# Altium PCB CPU.PcbDoc
Units mm, origin at the board's own origin, x right, y up, seen from the top; angles counter-clockwise.
Board outline 312 x 320 mm, 2 copper layers (Top Layer, Bottom Layer); 71 components, 61 nets, 327 pads, 8 vias.
Unrouted connection lines stored in the file: 131.
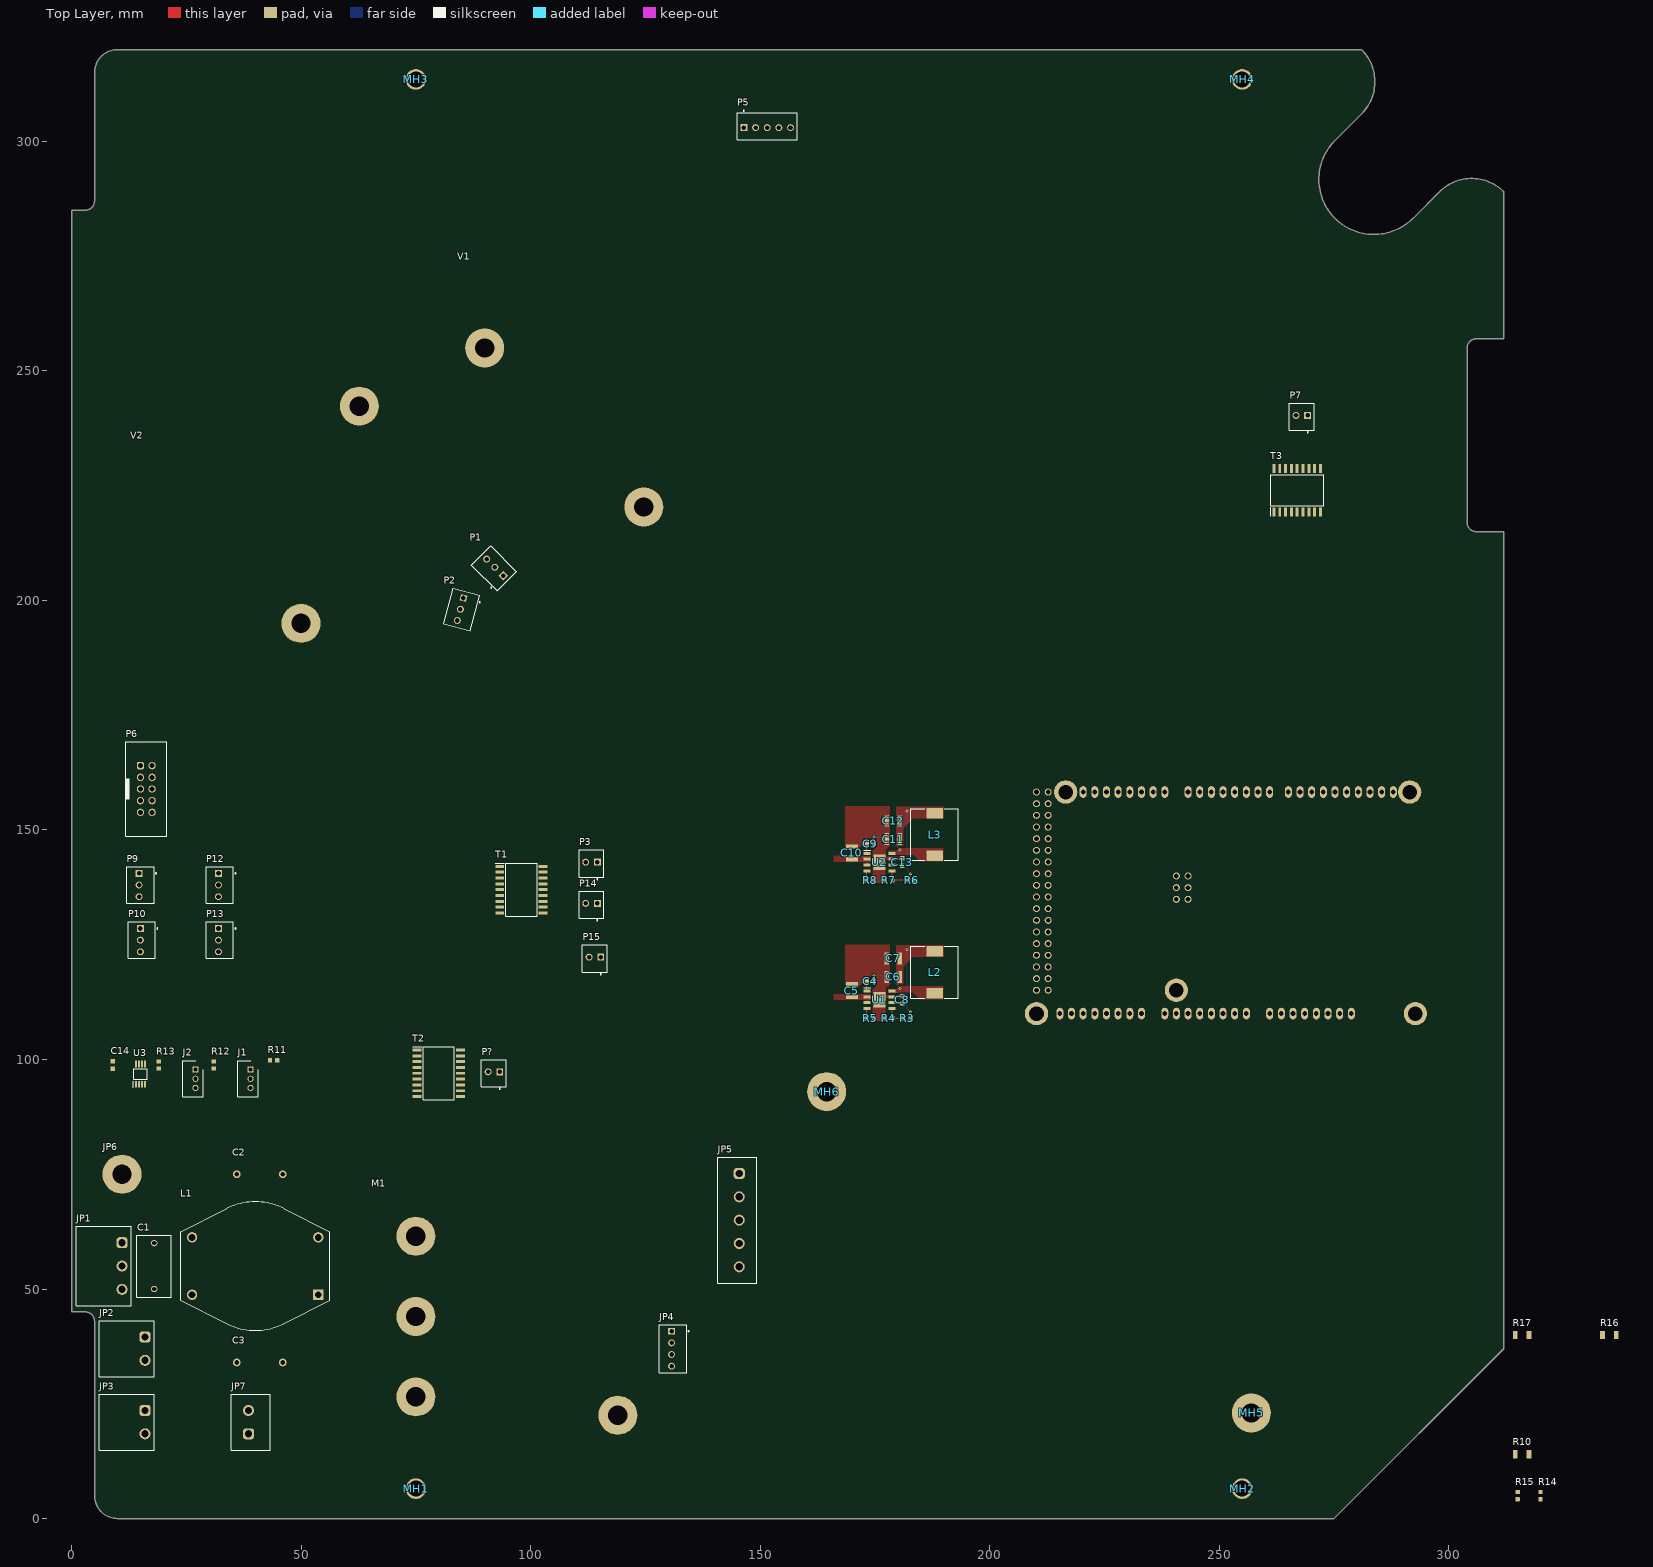
[diagram p0: Top Layer view]
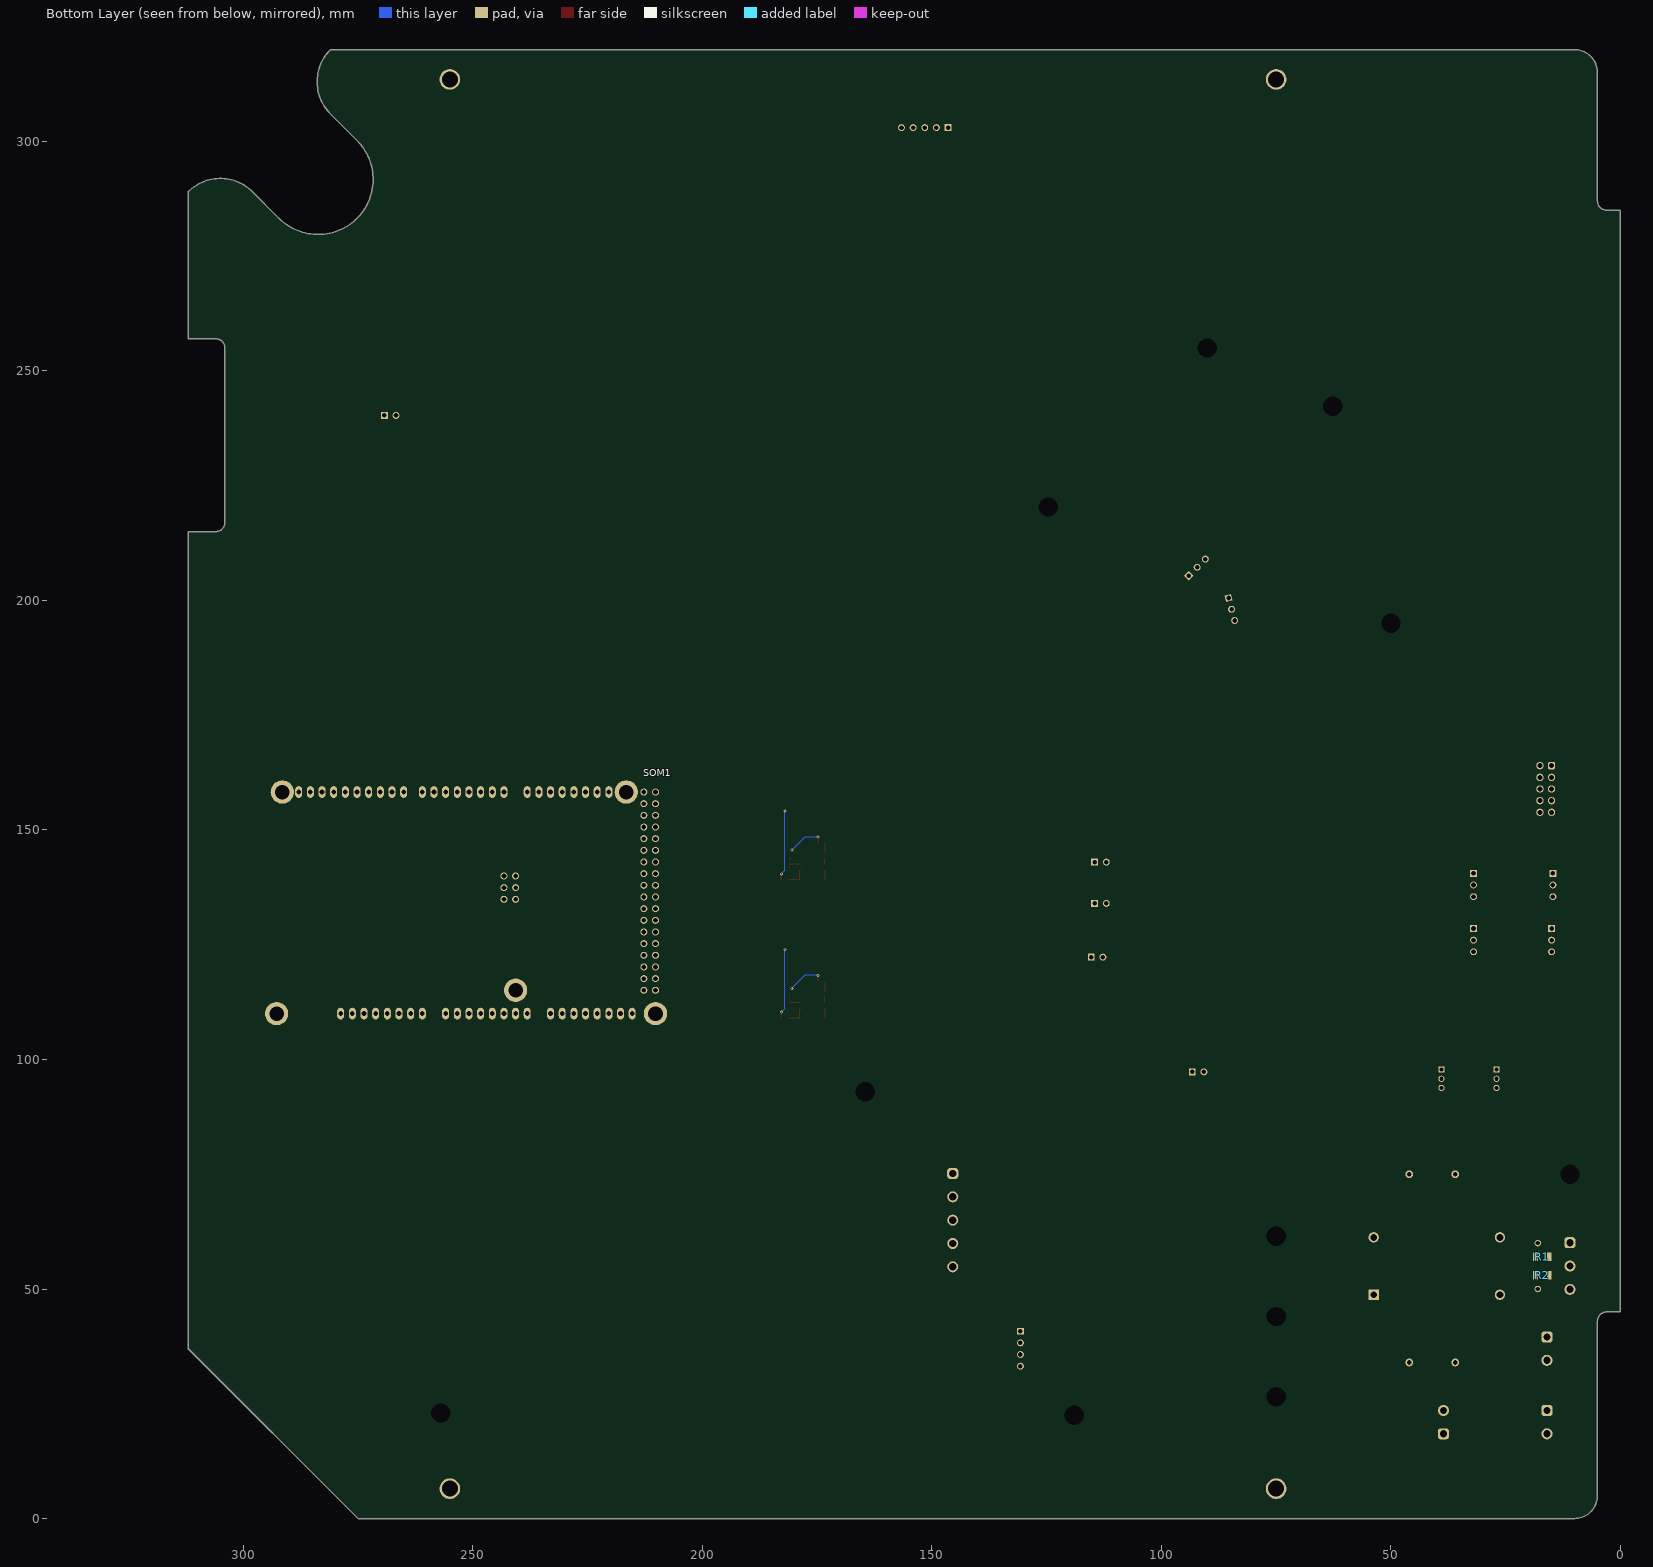
[diagram p1: Bottom Layer view, seen from below]

## Layer stack, top to bottom
Top Solder: solder mask 0.0102, Solder Resist, Dk 3.5
Top Layer: signal copper 0.0356
Dielectric 1: dielectric 0.32, FR-4, Dk 4.8
Bottom Layer: signal copper 0.0356
Bottom Solder: solder mask 0.0102, Solder Resist, Dk 3.5

## Board outline
5,5 5,43 ccw(c3,43) 3,45 0,45 0,285 3,285 ccw(c3,287) 5,287 5,315 cw(c10,315) 10,320 281,320 cw(c274,312.985) 281.015,305.985 275.23,300.201 ccw(c283.716,291.716) 292.201,283.23 297.985,289.015 cw(c305,282.015) 312,289.029 312,289 312,257 306,257 ccw(c306,255) 304,255 304,217 ccw(c306,217) 306,215 312,215 312,37 275,0 10,0 cw(c10,5)

## Design rules (kind name [scope] priority, off if disabled: settings)
Clearance [All] p1: gap=0.254 ignorepadtopadclearanceinfootprint=FALSE except(0: Arc-Hole Track-Hole SMDPad-Hole THPad-Hole Via-Hole Fill-Hole Poly-Hole Region-Hole Text-Hole)
Height [All] p1: minheight=0 maxheight=99 prefheight=99
PolygonConnect PolygonConnectDCDC [InComponentClass('U_SUPPLY')] p1: connectstyle=Direct reliefconductorwidth=0.254 reliefentries=4 polygonreliefangle="90 Angle" airgapwidth=0.254
PolygonConnect [All] p2: thpad.connectstyle=Relief thpad.reliefconductorwidth=0.254 thpad.reliefentries=4 thpad.polygonreliefangle="90 Angle" thpad.airgapwidth=0.254 smdpad.connectstyle=Relief smdpad.reliefconductorwidth=0.254 smdpad.reliefentries=4 smdpad.polygonreliefangle="90 Angle" smdpad.airgapwidth=0.254 via.connectstyle=Direct via.reliefconductorwidth=0.254 via.reliefentries=4 via.polygonreliefangle="90 Angle" via.airgapwidth=0.254
RoomDefinition U_TEMP [InComponentClass('U_TEMP')] p1: confinementstyle=ConfineIn formatcopy=TRUE lockcomponents=FALSE outline 8,90.8 47,90.8 47,103.8 8,103.8
RoomDefinition U_SUPPLY [InComponentClass('U_SUPPLY')] p2: confinementstyle=ConfineIn formatcopy=TRUE lockcomponents=FALSE outline 160,105 195,105 195,157 160,157
RoutingVias [All] p1: holewidth=0.711 width=1.27 viastyle="Through Hole" minholewidth=0.711 minwidth=1.27 maxholewidth=0.711 maxwidth=1.27
SolderMaskExpansion [All] p1: expansion=0.102 istentingtop=FALSE
Width [All] p1: maxlimit=0.254 minlimit=0.254 preferedwidth=0.254
29 further rules are at their usual default settings.

## Classes and differential pairs
net class INLET[1..2]: INLET1 INLET2
component class U_SW: P3 P7 P14 P15 P? R16 R17 T1 T2 T3
net class TERM[1..3]: TERM1 TERM2 TERM3
net class PUMP[1..2]: PUMP1 PUMP2
component class U_TEMP: C14 J1 J2 R11 R12 R13 U3
net class FAN[1..3]: FAN1 FAN2 FAN3
net class HEAT[1..2]: HEAT1 HEAT2
net class VALVE[1..11]: VALVE1 VALVE2 VALVE3 VALVE4 VALVE5 VALVE6 VALVE7 VALVE8 VALVE10 VALVE11
component class U_Arduino: R14 R15 SOM1
component class U_SUPPLY: C4 C5 C6 C7 C8 C9 C10 C11 C12 C13 L2 L3 R3 R4 R5 R6 R7 R8 U1 U2
component class CPU_top: C1 C2 C3 JP1 JP2 JP3 JP4 JP5 JP6 JP7 L1 M1 MH1 MH2 MH3 MH4 MH5 MH6 P1 P2 P5 P6 P9 P10 P12 P13 R1 R2 R10 V1 V2

## Components (designator, comment, footprint, x,y, rotation, side; value= is the part's Value field where it differs from the comment)
C1 "100nF, 275V" WCAP-FTX2_L13W7H13 18,55 r90 top
C2 "CAP" "CAP CERDISC 9x5.5 P10 H13.0 (IPC RoHS)" 41,75 r0 top value=2n2
C3 "CAP" "CAP CERDISC 9x5.5 P10 H13.0 (IPC RoHS)" 41,34 r0 top value=2n2
C4 "100nF 0603" "CAP_0603_H090 (_IPC_MD)" 174,117 r180 top value=100nF
C5 "22uF 1210" "CAP_1210_H090 (_IPC_HD)" 170,115 r270 top value=22uF
C6 "22uF 1210" "CAP_1210_H090 (_IPC_HD)" 179,118 r0 top value=22uF
C7 "22uF 1210" "CAP_1210_H090 (_IPC_HD)" 179,122 r0 top value=22uF
C8 "10nF 0603" "CAP_0603_H090 (_IPC_MD)" 181,113 r270 top value=10nF
C9 "100nF 0603" "CAP_0603_H090 (_IPC_MD)" 174,147 r180 top value=100nF
C10 "22uF 1210" "CAP_1210_H090 (_IPC_HD)" 170,145 r270 top value=22uF
C11 "22uF 1210" "CAP_1210_H090 (_IPC_HD)" 179,148 r0 top value=22uF
C12 "22uF 1210" "CAP_1210_H090 (_IPC_HD)" 179,152 r0 top value=22uF
C13 "10nF 0603" "CAP_0603_H090 (_IPC_MD)" 181,143 r270 top value=10nF
C14 "100nF 0603" "CAP_0603_H090 (_IPC_MD)" 9,98.8 r90 top value=100nF
J1 "B3B-PH-K-S_LF__SN_" SHDR3W50P0X200_1X3_790X450X600P 39,97.8 r90 top
J2 "B3B-PH-K-S_LF__SN_" SHDR3W50P0X200_1X3_790X450X600P 27,97.8 r90 top
JP1 "691313510003" 691313510003 7,55 r270 top
JP2 "691313510002" 691313510002 12,37 r270 top
JP3 "691313510002" 691313510002 12,21 r270 top
JP4 "61900411121" 61900411121 131,37 r90 top
JP5 "691311500105" 691311500105 145,65 r270 top
JP6 "Adafruit Standoff 6mm" 7466003 11,75 r0 top
JP7 "691311500102" 691311500102 39,21 r90 top
L1 "1mH" 744834101 40,55 r180 top
L2 "6.8uH, 11.5A" WE-HCC_1090 188,119 r90 top
L3 "6.8uH, 11.5A" WE-HCC_1090 188,149 r90 top
M1 "Dual channel SSR" SSR 65,16.5 r0 top
MH1 "Mounting hole" MECH_MHOLE_3.5-GND-2 75,6.5 r0 top
MH2 "Mounting hole" MECH_MHOLE_3.5-GND-2 255,6.5 r0 top
MH3 "Mounting hole" MECH_MHOLE_3.5-GND-2 75,313.5 r0 top
MH4 "Mounting hole" MECH_MHOLE_3.5-GND-2 255,313.5 r0 top
MH5 "Adafruit Standoff 6mm" 7466003 257,23 r0 top
MH6 "Adafruit Standoff 6mm" 7466003 164.5,93 r0 top
P1 "61900311121" 61900311121 92,207 r315 top
P2 "61900311121" 61900311121 85,198 r75 top
P3 "61900211121" 61900211121 113.27,142.7 r0 top
P5 "61900511121" 61900511121 151.54,303.3 r180 top
P6 "61201021621" 61201021621 16.27,158.92 r270 top
P7 "61900211121" 61900211121 268,240 r0 top
P9 "61900311121" 61900311121 15,138 r90 top
P10 "61900311121" 61900311121 15.3,126 r90 top
P12 "61900311121" 61900311121 32.3,138 r90 top
P13 "61900311121" 61900311121 32.3,126 r90 top
P14 "61900211121" 61900211121 113.27,133.7 r0 top
P15 "61900211121" 61900211121 114,122 r0 top
P? "61900211121" 61900211121 92,97 r0 top
R1 "511K 1% 0,25W 200V 1206" "RES_1206_H060 (_IPC_MD)" 17,57 r180 bottom value=511K
R2 "511K 1% 0,25W 200V 1206" "RES_1206_H060 (_IPC_MD)" 17,53 r0 bottom value=511K
R3 "115K 1% 0,1W 75V 0603" "RES_0603_H050 (_IPC_MD)" 182,109 r0 top value=115K
R4 "22.1K 1% 0,1W 75V 0603" "RES_0603_H050 (_IPC_MD)" 178,109 r0 top value=22.1K
R5 "200K 1% 0,1W 75V 0603" "RES_0603_H050 (_IPC_MD)" 174,109 r180 top value=200K
R6 "174K 1% 0,1W 75V 0603" "RES_0603_H050 (_IPC_MD)" 183,139 r0 top value=174K
R7 "22.1K 1% 0,1W 75V 0603" "RES_0603_H050 (_IPC_MD)" 178,139 r0 top value=22.1K
R8 "200K 1% 0,1W 75V 0603" "RES_0603_H050 (_IPC_MD)" 174,139 r180 top value=200K
R10 "100mR 1% 0,25W 200V 1206" "RES_1206_H060 (_IPC_MD)" 316,14 r0 top value=100mR
R11 "10.0K 1% 0,1W 75V 0603" "RES_0603_H050 (_IPC_MD)" 44,99.8 r0 top value=10.0K
R12 "10.0K 1% 0,1W 75V 0603" "RES_0603_H050 (_IPC_MD)" 31,98.8 r90 top value=10.0K
R13 "10.0K 1% 0,1W 75V 0603" "RES_0603_H050 (_IPC_MD)" 19,98.8 r90 top value=10.0K
R14 "1.82K 1% 0,1W 75V 0603" "RES_0603_H050 (_IPC_MD)" 320,5 r90 top value=1.82K
R15 "3.32K 1% 0,1W 75V 0603" "RES_0603_H050 (_IPC_MD)" 315,5 r90 top value=3.32K
R16 "100mR 1% 0,25W 200V 1206" "RES_1206_H060 (_IPC_MD)" 335,40 r0 top value=100mR
R17 "100mR 1% 0,25W 200V 1206" "RES_1206_H060 (_IPC_MD)" 316,40 r0 top value=100mR
SOM1 "ATMEGA2560" ATMEGA2560 306.72,107.46 r180 bottom
T1 "ULN2803ADWRG4" SOIC127P1030X265-18N 98,137 r0 top
T2 "ULN2803ADWRG4" SOIC127P1030X265-18N 80,97 r0 top
T3 "ULN2803ADWRG4" SOIC127P1030X265-18N 267,224 r90 top
U1 "AP64352QSP-13" SOIC127P600X163-9N 176,113 r0 top
U2 "AP64352QSP-13" SOIC127P600X163-9N 176,143 r0 top
U3 "DS18B20U+" SOP65P490X110-8N 15,96.8 r90 top
V1 "Brewie Valve" Valve2 90,255 r315 top
V2 "Brewie Valve" Valve2 50,195 r75 top

## Footprints (in the part's own frame and the unit in brackets; to place one, negate y for a bottom-side part, rotate by r counter-clockwise, add the part's x,y. Pads: shape width x height; smd on the part's side, far side on the other; paste and mask are expansions set on the pad)
7466003 [mm] "SMD with internal through-hole thread, M3-6mm"
  round 8.5 / inner round 0 / far side round 0 hole 4.2 unplated: 1(0,0)
  body extent -3.5,-3.5 3.5,3.5, height 5
744834101 [mm] "Common Mode Power  Line Choke, 4-Leads, body 32.5x28mm"
  rect 2.25x2.25 hole 1.5: 1(-13.75,6.25)
  round 2.25 hole 1.5: 2(13.75,6.25) 3(13.75,-6.25) 4(-13.75,-6.25)
  silkscreen extent -16.25,-14 16.25,14, body extent -16.25,-14 16.25,14, height 20.1
61201021621 [mm] "10 pins, straight, gold plating"
  rrect50% 1.6x1.6 hole 1.1: 1(-5.08,-1.27)
  round 1.6 hole 1.1: 2(-5.08,1.27) 3(-2.54,-1.27) 4(-2.54,1.27) 5(0,-1.27) 6(0,1.27) 7(2.54,-1.27) 8(2.54,1.27) 9(5.08,-1.27) 10(5.08,1.27)
  silkscreen extent -10.28,-4.5 10.28,4.5, body extent -10.18,-4.42 10.18,4.75, height 9.13
61900211121 [mm] "2.54mm Male Locking Header, 2p"
  rect 1.5x1.5 hole 1: 1(1.27,0.3)
  round 1.5 hole 1: 2(-1.27,0.3)
  silkscreen extent -2.71,-3.52 2.71,2.98, body extent -2.54,-2.9 2.54,2.9, height 11.53
61900311121 [mm] "2.54mm Male Locking Header, 3p"
  rect 1.5x1.5 hole 1: 1(2.54,0.3)
  round 1.5 hole 1: 2(0,0.3) 3(-2.54,0.3)
  silkscreen extent -3.98,-3.52 3.98,2.97, body extent -3.81,-2.9 3.81,2.9, height 11.53
61900411121 [mm] "2.54mm Male Locking Header, 4p"
  rect 1.5x1.5 hole 1: 1(3.81,0.3)
  round 1.5 hole 1: 2(1.27,0.3) 3(-1.27,0.3) 4(-3.81,0.3)
  silkscreen extent -5.25,-3.52 5.25,2.98, body extent -5.08,-2.9 5.08,2.9, height 11.53
61900511121 [mm] "2.54mm Male Locking Header, 5p"
  rect 1.5x1.5 hole 1: 1(5.08,0.3)
  round 1.5 hole 1: 2(2.54,0.3) 3(0,0.3) 4(-2.54,0.3) 5(-5.08,0.3)
  silkscreen extent -6.52,-3.52 6.52,2.98, body extent -6.35,-2.9 6.35,2.9, height 11.53
691311500102 [mm] "5,08mm - PCB Headers - Vertical - Closed ends -02p"
  rrect50% 2.4x2.4 hole 1.6: 1(-2.54,0.45)
  round 2.4 hole 1.6: 2(2.54,0.45)
  silkscreen extent -6.08,-4.25 6.08,4.25, body extent -6.08,-4.25 6.08,4.25, height 12.05
691311500105 [mm] "5,08mm - PCB Headers - Vertical - Closed ends -05p"
  rrect50% 2.4x2.4 hole 1.6: 1(-10.16,0.45)
  round 2.4 hole 1.6: 2(-5.08,0.45) 3(0,0.45) 4(5.08,0.45) 5(10.16,0.45)
  silkscreen extent -13.7,-4.25 13.7,4.25, body extent -13.7,-4.25 13.7,4.25, height 12.05
691313510002 [mm] "5,08mm - PCB Headers - Horizontal - Closed ends - 02p"
  rrect50% 2.4x2.4 hole 1.6: 1(-2.54,4)
  round 2.4 hole 1.6: 2(2.54,4)
  silkscreen extent -6.08,-6 6.08,6, body extent -6.08,-6 6.08,6, height 8.55
691313510003 [mm] "5,08mm - PCB Headers - Horizontal - Closed ends - 03p"
  rrect50% 2.4x2.4 hole 1.6: 1(-5.08,4)
  round 2.4 hole 1.6: 2(0,4) 3(5.08,4)
  silkscreen extent -8.62,-6 8.62,6, body extent -8.62,-6 8.62,6, height 8.55
ATMEGA2560 [mil]
  oval 60x100 hole 40: 1(1100,100) 2(1200,100) 3(1300,100) 4(1400,100) 5(1500,100) 6(1600,100) 7(1700,100) 8(1800,100) 9(2000,100) 10(2100,100) 11(2200,100) 12(2300,100) 13(2400,100) 14(2500,100) 15(2600,100) 16(2700,100) 17(2900,100) 18(3000,100) 19(3100,100) 20(3200,100) 21(3300,100) 22(3400,100) 23(3500,100) 24(3600,100) 25(3400,2000) 26(3300,2000) 27(3200,2000) 28(3100,2000) 29(3000,2000) 30(2900,2000) 31(2800,2000) 32(2700,2000) 33(2500,2000) 34(2400,2000) 35(2300,2000) 36(2200,2000) 37(2100,2000) 38(2000,2000) 39(1900,2000) 40(1800,2000) 41(1640,2000) 42(1540,2000) 43(1440,2000) 44(1340,2000) 45(1240,2000) 46(1140,2000) 47(1040,2000) 48(940,2000) 49(840,2000) 50(740,2000)
  round 60 hole 40: 51(3700,2000) 52(3800,2000) 53(3700,1900) 54(3800,1900) 55(3700,1800) 56(3800,1800) 57(3700,1700) 58(3800,1700) 59(3700,1600) 60(3800,1600) 61(3700,1500) 62(3800,1500) 63(3700,1400) 64(3800,1400) 65(3700,1300) 66(3800,1300) 67(3700,1200) 68(3800,1200) 69(3700,1100) 70(3800,1100) 71(3700,1000) 72(3800,1000) 73(3700,900) 74(3800,900) 75(3700,800) 76(3800,800) 77(3700,700) 78(3800,700) 79(3700,600) 80(3800,600) 81(3700,500) 82(3800,500) 83(3700,400) 84(3800,400) 85(3700,300) 86(3800,300) 87(2500,1280) 88(2600,1280) 89(2500,1180) 90(2600,1180) 91(2500,1080) 92(2600,1080)
  round 200 hole 125: MH1(550,100) MH2(2600,300) MH3(3800,100) MH4(3550,2000) MH5(600,2000)
"CAP CERDISC 9x5.5 P10 H13.0 (IPC RoHS)" [mm]
  round 1.7 / inner round 1.524 / far side round 1.7 hole 1 paste+0 mask+0.1: 1(-5,0) 2(5,0)
  body extent -5.32,-2.75 5.33,2.75, height 13
"CAP_0603_H090 (_IPC_MD)" [mm]
  rrect13% 0.95x1 smd paste+0 mask+0.1: 1(-0.8,0) 2(0.8,0)
  body extent -0.8,-0.4 0.8,0.4, height 0.9
"CAP_1210_H090 (_IPC_HD)" [mm]
  rrect13% 0.95x2.6 smd paste+0 mask+0.1: 1(-1.4,0) 2(1.4,0)
  body extent -1.6,-1.25 1.6,1.25, height 0.9
MECH_MHOLE_3.5-GND-2 [mm] "Mounting hole 3.5mm"
  round 4.5 hole 3.5 mask+0: 1(0,0)
  body extent -2,-2 2,2, height 1.61
"RES_0603_H050 (_IPC_MD)" [mm]
  rrect14% 0.9x0.95 smd paste+0 mask+0.1: 1(-0.8,0) 2(0.8,0)
  body extent -0.85,-0.45 0.85,0.45, height 0.55
"RES_1206_H060 (_IPC_MD)" [mm]
  rrect12% 1.05x1.8 smd paste+0 mask+0.1: 1(-1.495,0) 2(1.505,0)
  body extent -1.65,-0.85 1.65,0.85, height 0.65
SHDR3W50P0X200_1X3_790X450X600P [mm]
  rect 1.35x1.35 hole 0.9: 1(0,0)
  round 1.35 hole 0.9: 2(-2,0) 3(-4,0)
  silkscreen extent -5.95,-1.7 1.95,2.8, body extent -5.95,-1.7 1.95,2.8, height 6
SOIC127P600X163-9N [mm]
  rect 1.525x0.65 smd: 1(-2.688,1.905) 2(-2.688,0.635) 3(-2.688,-0.635) 4(-2.688,-1.905) 5(2.688,-1.905) 6(2.688,-0.635) 7(2.688,0.635) 8(2.688,1.905)
  rect 2.71x3.35 smd: 9(0,0)
  silkscreen extent -3.45,2.58 -1.92,2.58, body extent -3,-2.45 3,2.45, height 1.63
SOIC127P1030X265-18N [mm]
  rect 1.95x0.65 smd: 1(-4.725,5.08) 2(-4.725,3.81) 3(-4.725,2.54) 4(-4.725,1.27) 5(-4.725,0) 6(-4.725,-1.27) 7(-4.725,-2.54) 8(-4.725,-3.81) 9(-4.725,-5.08) 10(4.725,-5.08) 11(4.725,-3.81) 12(4.725,-2.54) 13(4.725,-1.27) 14(4.725,0) 15(4.725,1.27) 16(4.725,2.54) 17(4.725,3.81) 18(4.725,5.08)
  silkscreen extent -5.7,-5.77 3.4,5.77, body extent -5.15,-5.77 5.15,5.77, height 2.65
SOP65P490X110-8N [mm]
  rect 1.425x0.45 smd: 1(-2.212,0.975) 2(-2.212,0.325) 3(-2.212,-0.325) 4(-2.212,-0.975) 5(2.212,-0.975) 6(2.212,-0.325) 7(2.212,0.325) 8(2.212,0.975)
  silkscreen extent -2.93,-1.5 1.15,1.55, body extent -2.45,-1.5 2.45,1.5, height 1.1
SSR [mm]
  round 8.5 / inner round 0 / far side round 0 hole 4.2 unplated: 1(10,45) 2(10,27.5) 3(10,10) 4(54,6)
  body extent 0,0 60,55, height 26
Valve2 [mm]
  round 8.5 / inner round 0 / far side round 0 hole 4.2: 1(0,0) 1(49,0)
  body extent -13,-26.6 64,40.4, height 89.01
WCAP-FTX2_L13W7H13 [mm] "Film Capacitors, 13x7x13mm"
  round 1.4 hole 0.9: 1(-5,0) 2(5,0)
  silkscreen extent -6.75,-3.75 6.75,3.75, body extent -6.5,-3.5 6.5,3.5, height 13.05
WE-HCC_1090 [mm] "SMT High Current Cube Inductor, 2-Leads, body 10.9x10mm"
  rect 2.3x3.6 smd: 1(-4.6,0) 2(4.6,0)
  silkscreen extent -5.65,-5.2 5.65,5.2, body extent -5.12,-5 5.13,5, height 9.3

## Part data
C1: library part 890324023023, "WCAP-FTX2 Film Capacitor, THT, L13W7H13, 100nF, 275V", Capacitance=100nF, Capacitance Tolerance=+/-10%, Insulation Resistance=30000MOhm, Manufacturer="Wurth Elektronik", Operating Temperature="-40 to +105degC", Rate of Voltage Rise=300V/us, Rated Voltage=275VAC, ComponentLink1Description=Manufacturer, ComponentLink1URL=http://www.we-online.de, ComponentLink2Description=Datasheet, ComponentLink2URL=https://www.we-online.com/catalog/datasheet/890324023023.pdf, Dissipation Factor@1kHz=0.1%, Dissipation Factor@10kHz=0.1%, Dissipation Factor@100kHz=0.5%, Height=13mm, Length=13mm, Manufacturer Part Number=890324023023, Mounting Technology=THT, Packaging=Carton, Pitch=10mm, Published Date="May 2020", Technical Reference=MX2P010104K275ASPB16000, Width=7mm
C2 C3: library part 2235-0004, "Cap X1Y1 2n2 400Vac 20% Y5V 4M E", Curr="Typ X1/Y1", Mfg Part Nr=C921U222MVVDBA7317, Temp=E, Volt=400Vac, Check=N, Component=C921U222MVVDBA7317, Create=Urband, EEPAB Prt Nr=2235-0004, Part Number=2235-0004, PCB Footprint="CAP CERDISC 9x5.5 P10 H13.0 (IPC RoHS)", PCB Lib="EEPAB Hole mount.PcbLib", Qty=1, Scm Lib=Discrete.SchLib, Scm Symbol=CAP, Supplier 1=Arrow, Supplier 2=Avnet, Supplier 3=Digi-Key, Supplier 4=Distrelec, Supplier 5=Farnell, Supplier 6="Future Electronics", Supplier 7=Mouser, Supplier 8=RSComponents, Supplier 9=Rutronik, Supplier 10=TTI, Supplier Part Number 1=C921U222MVVDBA7317, Supplier Part Number 3=399-9487-1-ND, Supplier Part Number 5=2440214, Supplier Part Number 7=80-C921U222MVVDBAP, Tol=20%, Type=Standard
C4 C9 C14: library part CL10B104KB8NNNC, "CAP CER 100NF 50V X7R 0603", Dielec=X7R, Volt=50V, Part Number=CL10B104KB8NNNC, PCB Lib=MUAB_CAP.PcbLib, Qty=1, Scm Lib=Discrete.SchLib, Supplier 1=Arrow, Supplier 2=Avnet, Supplier 3=Digi-Key, Supplier 4=Distrelec, Supplier 5=Farnell, Supplier 6="Future Electronics", Supplier 7=Mouser, Supplier 8=RSComponents, Supplier 9=Rutronik, Supplier 10="SEED OPL", Supplier Part Number 3=1276-1000-1-ND, Supplier Part Number 7=187-CL10B104KB8NNNC, Tol=10%, Type=Standard
C5 C6 C7 C10 C11 C12: library part MA1210XR226K250ER, "CAP CER 22UF 25V X7R 1210", Dielec=X7R, Volt=25V, Part Number=MA1210XR226K250ER, PCB Lib=MUAB_CAP.PcbLib, Qty=1, Scm Lib=Discrete.SchLib, Supplier 1=Arrow, Supplier 2=Avnet, Supplier 3=Digi-Key, Supplier 4=Distrelec, Supplier 5=Farnell, Supplier 6="Future Electronics", Supplier 7=Mouser, Supplier 8=RSComponents, Supplier 9=Rutronik, Supplier 10="SEED OPL", Tol=10%, Type=Standard
C8 C13: library part CGA3E2C0G1H103J080AA, "CAP CER 10NF 50V C0G/NP0 0603", Dielec=C0G, Volt=50V, Part Number=CGA3E2C0G1H103J080AA, PCB Lib=MUAB_CAP.PcbLib, Qty=1, Scm Lib=Discrete.SchLib, Supplier 1=Arrow, Supplier 2=Avnet, Supplier 3=Digi-Key, Supplier 4=Distrelec, Supplier 5=Farnell, Supplier 6="Future Electronics", Supplier 7=Mouser, Supplier 8=RSComponents, Supplier 9=Rutronik, Supplier 10="SEED OPL", Supplier Part Number 3=445-6916-1-ND, Supplier Part Number 7=810-CGA3E2C0G1H103J, Tol=5%, Type=Standard
J1 J2: "Connector", Arrow Part Number=B3B-PH-K-S(LF)(SN), Manufacturer_Name="JST (JAPAN SOLDERLESS TERMINALS)", Arrow Price/Stock=https://www.arrow.com/en/products/b3b-ph-k-s-lf-sn/jst-manufacturing, Datasheet Link=http://www.jst-mfg.com/product/pdf/eng/ePH.pdf, Height=6mm, Manufacturer_Part_Number=B3B-PH-K-S(LF)(SN), RS-Online=8201431P
JP1: "WR-TBL Serie 313 Close Horizontal PCB Header, Pluggable, THT, pitch 5.08mm, 3p", Manufacturer="Wurth Elektronik", Operating Temperature="-40 to +105degC", Rated Current [UL]=20A, Working Voltage [UL]=300VAC, Application=Pluggable, ComponentLink1Description=Manufacturer, ComponentLink1URL=http://www.we-online.de, ComponentLink2Description=Datasheet, ComponentLink2URL=https://katalog.we-online.de/em/datasheet/691313510003.pdf, Manufacturer Part Number=691313510003, Modularity=No, Mounting Technology=THT, Packaging=Box, PCB/Cable/Panel=PCB, Pin Number=3, Pitch=5.08mm, Published Date="Feburary 2021", Type=Horizontal
JP2 JP3: "WR-TBL Serie 313 Close Horizontal PCB Header, Pluggable, THT, pitch 5.08mm, 2p", Manufacturer="Wurth Elektronik", Operating Temperature="-40 to +105degC", Rated Current [UL]=20A, Working Voltage [UL]=300VAC, Application=Pluggable, ComponentLink1Description=Manufacturer, ComponentLink1URL=http://www.we-online.de, ComponentLink2Description=Datasheet, ComponentLink2URL=https://katalog.we-online.de/em/datasheet/691313510002.pdf, Manufacturer Part Number=691313510002, Modularity=No, Mounting Technology=THT, Packaging=Box, PCB/Cable/Panel=PCB, Pin Number=2, Pitch=5.08mm, Published Date="Feburary 2021", Type=Horizontal
JP4: "WR-WTB THT Male Vertical Locking Header, pitch 2.54mm, 4p", Contact Resistance=20mOhm, Operating Temperature="-40 to +105degC", Rated Current=3A, Withstanding Voltage=1000VAC, Working Voltage=250VAC, ComponentLink1Description=Manufacturer, ComponentLink1URL=http://www.we-online.de, ComponentLink2Description=Datasheet, ComponentLink2URL=https://www.we-online.com/catalog/datasheet/61900411121.pdf, Gender=Male, Mounting Technology=THT, Packaging=Bag, Part Number=61900411121, Pin Number=4, Pitch=2.54mm, Published Date="January 2020", Publisher="Wurth Elektronik", Type=Vertical
JP5: "WR-TBL Serie 311 Close Vertical PCB Header, Pluggable, THT, pitch 5.08mm, 5p", Manufacturer="Wurth Elektronik", Operating Temperature="-40 to +105degC", Rated Current [UL]=20A, Working Voltage [UL]=300VAC, Application=Pluggable, ComponentLink1Description=Manufacturer, ComponentLink1URL=http://www.we-online.de, ComponentLink2Description=Datasheet, ComponentLink2URL=https://katalog.we-online.de/em/datasheet/691311500105.pdf, Manufacturer Part Number=691311500105, Modularity=No, Mounting Technology=THT, Packaging=Box, PCB/Cable/Panel=PCB, Pin Number=5, Pitch=5.08mm, Published Date="Feburary 2021", Type=Vertical
JP6 MH5 MH6: library part CONNM3, Manufacturer=Adafruit, Height=6mm
JP7: "WR-TBL Serie 311 Close Vertical PCB Header, Pluggable, THT, pitch 5.08mm, 2p", Manufacturer="Wurth Elektronik", Operating Temperature="-40 to +105degC", Rated Current [UL]=20A, Working Voltage [UL]=300VAC, Application=Pluggable, ComponentLink1Description=Manufacturer, ComponentLink1URL=http://www.we-online.de, ComponentLink2Description=Datasheet, ComponentLink2URL=https://katalog.we-online.de/em/datasheet/691311500102.pdf, Manufacturer Part Number=691311500102, Modularity=No, Mounting Technology=THT, Packaging=Box, PCB/Cable/Panel=PCB, Pin Number=2, Pitch=5.08mm, Published Date="Feburary 2021", Type=Vertical
L1: library part 744834101, "WE-CMBH Common Mode Power Line Choke, Type L, 1mH", DC Resistance max.=12.5mOhm, Insulation Test Voltage=1500VAC, Manufacturer="Wurth Elektronik", Operating Temperature="-40 to +125degC", Rated Current=10A, Rated Voltage=250VAC, ComponentLink1Description=Manufacturer, ComponentLink1URL=http://www.we-online.de, ComponentLink2Description=Datasheet, ComponentLink2URL=https://www.we-online.com/catalog/datasheet/744834101.pdf, Inductance=1mH, Manufacturer Part Number=744834101, Mounting Technology=THT, Packaging=Tray, Published Date="April 2020", Size="Type L"
L2 L3: library part 7443330680, "WE-HCC SMT High Current Cube Inductor, size 1090, 6.8uH, 11.5A", DC Resistance max.=15mOhm, DC Resistance typ.=14.15mOhm, Inductance=6.8uH, Manufacturer="Wurth Elektronik", Operating Temperature="-40 to +125degC", Rated Current=11.5A, Rated Inductance=4.5uH, Saturation Current=11A, Self Resonant Frequency=40MHz, ComponentLink1Description=Manufacturer, ComponentLink1URL=http://www.we-online.de, ComponentLink2Description=Datasheet, ComponentLink2URL=https://www.we-online.com/catalog/datasheet/7443330680.pdf, Height=9.3mm, Length=10.9mm, Manufacturer Part Number=7443330680, Material=Ferrite, Mounting Technology=SMT, Packaging="Tape and Reel", Size=1090, Width=10mm
M1: library part SSR
MH1 MH2 MH3 MH4: library part MECH_MHOLE_NET
P1 P2 P9 P10 P12 P13: "WR-WTB THT Male Vertical Locking Header, pitch 2.54mm, 3p", Contact Resistance=20mOhm, Operating Temperature="-40 to +105degC", Rated Current=3A, Withstanding Voltage=1000VAC, Working Voltage=250VAC, ComponentLink1Description=Manufacturer, ComponentLink1URL=http://www.we-online.de, ComponentLink2Description=Datasheet, ComponentLink2URL=https://www.we-online.com/catalog/datasheet/61900311121.pdf, Gender=Male, Mounting Technology=THT, Packaging=Bag, Part Number=61900311121, Pin Number=3, Pitch=2.54mm, Published Date="January 2020", Publisher="Wurth Elektronik", Type=Vertical
P3 P7 P14 P15 P?: "WR-WTB THT Male Vertical Locking Header, pitch 2.54mm, 2p", Contact Resistance=20mOhm, Operating Temperature="-40 to +105degC", Rated Current=3A, Withstanding Voltage=1000VAC, Working Voltage=250VAC, ComponentLink1Description=Manufacturer, ComponentLink1URL=http://www.we-online.de, ComponentLink2Description=Datasheet, ComponentLink2URL=https://www.we-online.com/catalog/datasheet/61900211121.pdf, Gender=Male, Mounting Technology=THT, Packaging=Bag, Part Number=61900211121, Pin Number=2, Pitch=2.54mm, Published Date="January 2020", Publisher="Wurth Elektronik", Type=Vertical
P5: "WR-WTB THT Male Vertical Locking Header, pitch 2.54mm, 5p", Contact Resistance=20mOhm, Operating Temperature="-40 to +105degC", Rated Current=3A, Withstanding Voltage=1000VAC, Working Voltage=250VAC, ComponentLink1Description=Manufacturer, ComponentLink1URL=http://www.we-online.de, ComponentLink2Description=Datasheet, ComponentLink2URL=https://www.we-online.com/catalog/datasheet/61900511121.pdf, Gender=Male, Mounting Technology=THT, Packaging=Bag, Part Number=61900511121, Pin Number=5, Pitch=2.54mm, Published Date="January 2020", Publisher="Wurth Elektronik", Type=Vertical
P6: "WR-BHD Box Header, Male, pitch 2.54mm, THT, Straight, 10p", Contact Resistance=20mOhm, Insulation Resistance=1000MOhm, Manufacturer="Wurth Elektronik", Operating Temperature max.=105C, Operating Temperature min.=-40C, Rated Current=3A, Withstanding Voltage=500V, Working Voltage=250V, ComponentLink1Description="Manufacturer Link", ComponentLink1URL=http://www.we-online.de, ComponentLink2Description=Datasheet, ComponentLink2URL=https://www.we-online.com/catalog/datasheet/61201021621.pdf, Gender=Male, Height=9.1mm, Length=20.36mm, Manufacturer Part Number=61201021621, Mounting Technology=THT, Number of Positions=10, Number of Rows=2, Orientation=Straight, Packaging=Tray, Pitch=2.54mm, Width=9.1mm
R1 R2: library part RES511K1%1206, Volt=200V, Part Number=RES511K1%1206, PCB Lib=MUAB_RES.PcbLib, Qty=1, Scm Lib=Discrete.SchLib, Supplier 1=Arrow, Supplier 2=Avnet, Supplier 3=Digi-Key, Supplier 4=Distrelec, Supplier 5=Farnell, Supplier 6="Future Electronics", Supplier 7=Mouser, Supplier 8=RSComponents, Supplier 9=Rutronik, Supplier 10="SEED OPL", Tol=1%, Type=Standard, Watt=0,25W
R3: library part RES115K1%0603, Volt=75V, Part Number=RES115K1%0603, PCB Lib=MUAB_RES.PcbLib, Qty=1, Scm Lib=Discrete.SchLib, Supplier 1=Arrow, Supplier 2=Avnet, Supplier 3=Digi-Key, Supplier 4=Distrelec, Supplier 5=Farnell, Supplier 6="Future Electronics", Supplier 7=Mouser, Supplier 8=RSComponents, Supplier 9=Rutronik, Supplier 10="SEED OPL", Tol=1%, Type=Standard, Watt=0,1W
R4 R7: library part RES22.1K1%0603, Volt=75V, Part Number=RES22.1K1%0603, PCB Lib=MUAB_RES.PcbLib, Qty=1, Scm Lib=Discrete.SchLib, Supplier 1=Arrow, Supplier 2=Avnet, Supplier 3=Digi-Key, Supplier 4=Distrelec, Supplier 5=Farnell, Supplier 6="Future Electronics", Supplier 7=Mouser, Supplier 8=RSComponents, Supplier 9=Rutronik, Supplier 10="SEED OPL", Tol=1%, Type=Standard, Watt=0,1W
R5 R8: library part RES200K1%0603, Volt=75V, Part Number=RES200K1%0603, PCB Lib=MUAB_RES.PcbLib, Qty=1, Scm Lib=Discrete.SchLib, Supplier 1=Arrow, Supplier 2=Avnet, Supplier 3=Digi-Key, Supplier 4=Distrelec, Supplier 5=Farnell, Supplier 6="Future Electronics", Supplier 7=Mouser, Supplier 8=RSComponents, Supplier 9=Rutronik, Supplier 10="SEED OPL", Tol=1%, Type=Standard, Watt=0,1W
R6: library part RES174K1%0603, Volt=75V, Part Number=RES174K1%0603, PCB Lib=MUAB_RES.PcbLib, Qty=1, Scm Lib=Discrete.SchLib, Supplier 1=Arrow, Supplier 2=Avnet, Supplier 3=Digi-Key, Supplier 4=Distrelec, Supplier 5=Farnell, Supplier 6="Future Electronics", Supplier 7=Mouser, Supplier 8=RSComponents, Supplier 9=Rutronik, Supplier 10="SEED OPL", Tol=1%, Type=Standard, Watt=0,1W
R10 R16 R17: library part RES100mR1%1206, Volt=200V, Part Number=RES100mR1%1206, PCB Lib=MUAB_RES.PcbLib, Qty=1, Scm Lib=Discrete.SchLib, Supplier 1=Arrow, Supplier 2=Avnet, Supplier 3=Digi-Key, Supplier 4=Distrelec, Supplier 5=Farnell, Supplier 6="Future Electronics", Supplier 7=Mouser, Supplier 8=RSComponents, Supplier 9=Rutronik, Supplier 10="SEED OPL", Tol=1%, Type=Standard, Watt=0,25W
R11 R12 R13: library part RES10.0K1%0603, Volt=75V, Part Number=RES10.0K1%0603, PCB Lib=MUAB_RES.PcbLib, Qty=1, Scm Lib=Discrete.SchLib, Supplier 1=Arrow, Supplier 2=Avnet, Supplier 3=Digi-Key, Supplier 4=Distrelec, Supplier 5=Farnell, Supplier 6="Future Electronics", Supplier 7=Mouser, Supplier 8=RSComponents, Supplier 9=Rutronik, Supplier 10="SEED OPL", Tol=1%, Type=Standard, Watt=0,1W
R14: library part RES1.82K1%0603, Volt=75V, Part Number=RES1.82K1%0603, PCB Lib=MUAB_RES.PcbLib, Qty=1, Scm Lib=Discrete.SchLib, Supplier 1=Arrow, Supplier 2=Avnet, Supplier 3=Digi-Key, Supplier 4=Distrelec, Supplier 5=Farnell, Supplier 6="Future Electronics", Supplier 7=Mouser, Supplier 8=RSComponents, Supplier 9=Rutronik, Supplier 10="SEED OPL", Tol=1%, Type=Standard, Watt=0,1W
R15: library part RES3.32K1%0603, Volt=75V, Part Number=RES3.32K1%0603, PCB Lib=MUAB_RES.PcbLib, Qty=1, Scm Lib=Discrete.SchLib, Supplier 1=Arrow, Supplier 2=Avnet, Supplier 3=Digi-Key, Supplier 4=Distrelec, Supplier 5=Farnell, Supplier 6="Future Electronics", Supplier 7=Mouser, Supplier 8=RSComponents, Supplier 9=Rutronik, Supplier 10="SEED OPL", Tol=1%, Type=Standard, Watt=0,1W
T1 T2 T3: "Darlington", Manufacturer_Name="Texas Instruments", Mouser Part Number=595-ULN2803ADWRG4, Arrow Part Number=ULN2803ADWRG4, Arrow Price/Stock=https://www.arrow.com/en/products/uln2803adwrg4/texas-instruments, Datasheet Link=http://www.ti.com/lit/ds/symlink/uln2803a.pdf, Height=2.65mm, Manufacturer_Part_Number=ULN2803ADWRG4, Mouser Price/Stock=https://www.mouser.co.uk/ProductDetail/Texas-Instruments/ULN2803ADWRG4?qs=pbofycSusePr3zMQZfJ%2FRA%3D%3D, Supplier 1=Mouser, Supplier Part Number 1=595-ULN2803ADWRG4
U1 U2: "DCDC CONV HV BUCK SO-8EP T&R 4K", Curr=3.5A, Temp=I, Volt="3.8V to 40V", Volt Out=ADJ, Component=AP64352, Part Number=AP64352QSP-13, Qty=1, Supplier 1=Arrow, Supplier 2=Avnet, Supplier 3=Digi-Key, Supplier 4=Distrelec, Supplier 5=Farnell, Supplier 6="Future Electronics", Supplier 7=Mouser, Supplier 8=RSComponents, Supplier 9=Rutronik, Supplier 10=TTI, Supplier Part Number 3=31-AP64352QSP-13CT-ND, Supplier Part Number 7=621-AP64352QSP-13, Type=Standard
U3: "Te,perature sensor", Manufacturer_Name="Maxim Integrated", Mouser Part Number=700-DS18B20U, Supplier Part Number 1=1901809P, Arrow Part Number=DS18B20U+, Arrow Price/Stock=https://www.arrow.com/en/products/ds18b20u/maxim-integrated?region=nac, Datasheet Link=https://datasheets.maximintegrated.com/en/ds/DS18B20.pdf, Height=1.1mm, Manufacturer_Part_Number=DS18B20U+, Mouser Price/Stock=https://www.mouser.co.uk/ProductDetail/Maxim-Integrated/DS18B20U%2b?qs=7H2Jq%252ByxpJLxAEcPXZtrFQ%3D%3D, Supplier 1=RSComponents
V1 V2: library part Valve
SOM1: Arduino="ATMega 2560"

## Via types
v1: diameter 0.65, hole 0.3, Top Layer to Bottom Layer, 8 vias

## Nets (pads, with @x,y where several pads share a name; then routed paths per layer and width w, separated by ;. In a path a pad name is that pad's centre, name@x,y a point inside that pad or via, vN(x,y) a via of type N, cw(c..) or ccw(c..) an arc to the next point about the centre after c; other vN are vias at no path point)
5V: C6.2 C7.2 C14.2 J1.1 J2.1 JP4.1 L2.2 P5.1 R3.2 R11.1 R12.1 R13.1 SOM1.74 U3.8 | length 15.3
  Top Layer w0.254: R3.2 v1(182.8,110.3)
  Bottom Layer w0.254: v1(182,124) 182,111.1 v1(182.8,110.3)
7V: C11.2 C12.2 L3.2 P1.2 P2.2 P6.1 P6.2 P6.4 P9.2 P10.2 P12.2 P13.2 R6.2 | length 15.3
  Top Layer w0.254: 182.8,139.127 v1(182.8,140.427)
  Bottom Layer w0.254: v1(182,154.127) 182,141.227 v1(182.8,140.427)
12V: C5.2 C10.2 JP5.5 P3.2 P7.2 P14.2 P15.2 P?.2 T1.10 T2.10 T3.10 U1.2 U1.3 U2.2 | length 1.3
  Top Layer w0.254: U1.3 U1.2
BST1: C4.2 U1.1 | length 2.1
  Top Layer w0.254: C4.2 173.2,115.017 U1.1
BST2: C9.2 U2.1 | length 2.1
  Top Layer w0.254: C9.2@173.2,147.127 173.2,145.144 U2.1@173.312,145.032
FAN1: SOM1.41 T1.1
FAN2: SOM1.77 T1.2
FAN3: T1.3
GND: C5.1 C6.1 C7.1 C8.1 C10.1 C11.1 C12.1 C13.1 C14.1 J1.3 J2.3 JP4.4 JP5.4 M1.4 P5.4 R4.1 R5.1 R7.1 R8.1 R10.1 R15.2 R16.1 R17.1 SOM1.76 SOM1.MH1 SOM1.MH2 SOM1.MH3 SOM1.MH4 SOM1.MH5 T1.9 U1.7 U1.9 U2.7 U2.9 U3.4 V1.1 V2.1 | length 0.5
  Top Layer w0.254: C8.1@180.835,113.635 C8.1 ; C13.1@180.835,143.762 C13.1@181,143.927
HEAT1: JP4.2 SOM1.46
HEAT2: JP4.3 SOM1.37
INLET1: SOM1.39 T1.5 T1.6
INLET2: SOM1.40 T1.7 T1.8
INT: SOM1.83
L: C2.2 JP7.1 L1.4 M1.1
Lext: C1.2 JP1.1 L1.3 R1.1
N: C3.2 JP2.2 JP3.2 JP5.2 L1.1
NetC8_2: C8.2 U1.6 | length 2.4
  Top Layer w0.254: U1.6 180.835,112.365 C8.2
NetC13_2: C13.2 U2.6 | length 2.4
  Top Layer w0.254: U2.6@178.688,142.492 180.835,142.492 C13.2@181,142.327
NetJP2_1: JP2.1 M1.2
NetJP3_1: JP3.1 M1.3
NetJP5_1: JP5.1 JP7.2
NetP3_1: P3.1 T1.18
NetP5_2: P5.2 R14.2 R15.1
NetP7_1: P7.1 T3.17 T3.18
NetP14_1: P14.1 T1.17
NetP15_1: P15.1 T1.16
NetP?_1: P?.1 T2.17 T2.18
NetR1_2: R1.2 R2.1
NetR3_1: R3.1 R4.2 U1.5 | length 4.5
  Top Layer w0.254: U1.5 178.8,110.983 R4.2 R3.1
NetR5_2: R5.2 U1.4 | length 2.1
  Top Layer w0.254: R5.2 173.2,110.983 U1.4
NetR6_1: R6.1 R7.2 U2.5 | length 4.5
  Top Layer w0.254: U2.5@178.688,141.222 178.8,141.11 178.8,139.127 181.2,139.127
NetR8_2: R8.2 U2.4 | length 2.1
  Top Layer w0.254: R8.2@173.2,139.127 173.2,141.11 U2.4@173.312,141.222
NetT1_11: T1.11 T1.12
NetT1_13: T1.13 T1.14
Next: C1.1 JP1.2 L1.2 R2.2
PE: C2.1 C3.1 JP1.3 JP5.3 JP6.1 MH1.1 MH2.1 MH3.1 MH4.1
PUMP1: T3.1 T3.2
PUMP1_SENSE: R17.2 T3.9
PUMP2: T2.1 T2.2
PUMP2_SENSE: R16.2 T2.9
PWREN: U2.3 | length 1.3
  Top Layer w0.254: U2.3@173.312,142.492 173.312,143.762
RESET: P5.5 SOM1.72
RX0: P5.3 SOM1.33
SW1: C4.1 L2.1 U1.8 | length 8.2
  Top Layer w0.254: C4.1 v1(174.8,118.3)
  Bottom Layer w0.254: v1(174.8,118.3) 177.7,118.3 v1(180.5,115.5)
SW2: C9.1 L3.1 U2.8 | length 8.2
  Top Layer w0.254: C9.1@174.8,147.127 v1(174.8,148.427)
  Bottom Layer w0.254: v1(174.8,148.427) 177.7,148.427 v1(180.5,145.627)
TERM1: J1.2 R11.2 SOM1.43
TERM2: J2.2 R12.2 SOM1.44
TERM3: R13.2 SOM1.11 U3.1
TX0: R14.1 SOM1.34
VALVE1: P1.3 SOM1.53
VALVE2: P2.3 SOM1.54
VALVE3: P9.3 SOM1.55
VALVE4: P10.3 SOM1.56
VALVE5: P6.3 SOM1.57
VALVE6: P6.6 SOM1.58
VALVE7: P6.5 SOM1.59
VALVE8: P6.7 SOM1.60
VALVE10: P12.3 SOM1.61
VALVE11: P13.3 SOM1.62
VALVE_SENSE: P1.1 P2.1 P6.8 P6.9 P6.10 P9.1 P10.1 P12.1 P13.1 R10.2
pads on no net: MH5.1 MH6.1 SOM1.1 SOM1.2 SOM1.3 SOM1.4 SOM1.5 SOM1.6 SOM1.7 SOM1.8 SOM1.9 SOM1.10 SOM1.12 SOM1.13 SOM1.14 SOM1.15 SOM1.16 SOM1.17 SOM1.18 SOM1.19 SOM1.20 SOM1.21 SOM1.22 SOM1.23 SOM1.24 SOM1.25 SOM1.26 SOM1.27 SOM1.28 SOM1.29 SOM1.30 SOM1.31 SOM1.32 SOM1.35 SOM1.36 SOM1.38 SOM1.42 SOM1.45 SOM1.47 SOM1.48 SOM1.49 SOM1.50 SOM1.51 SOM1.52 SOM1.63 SOM1.64 SOM1.65 SOM1.66 SOM1.67 SOM1.68 SOM1.69 SOM1.70 SOM1.71 SOM1.73 SOM1.75 SOM1.78 SOM1.79 SOM1.80 SOM1.81 SOM1.82 SOM1.84 SOM1.85 SOM1.86 SOM1.87 SOM1.88 SOM1.89 SOM1.90 SOM1.91 SOM1.92 T1.4 T1.15 T2.3 T2.4 T2.5 T2.6 T2.7 T2.8 T2.11 T2.12 T2.13 T2.14 T2.15 T2.16 T3.3 T3.4 T3.5 T3.6 T3.7 T3.8 T3.11 T3.12 T3.13 T3.14 T3.15 T3.16 U3.2 U3.3 U3.5 U3.6 U3.7

## Polygon pours and split planes (outlines as drawn)
GND on Top Layer "GND_L01_P008" (solid, pour order 8): 174.2,138.527 177.7,138.527 177.7,139.727 177.3,140.127 177.3,143.527 181.5,143.527 181.5,144.127 177.4,144.127 177.4,145.627 178.2,146.427 178.2,155.127 168.5,155.127 168.5,146.027 171.6,146.027 172.3,146.727 172.3,147.927 172.6,148.227 175.3,148.227 175.3,146.227 174.5,145.427 174.5,140.227 174.2,139.927
12V on Top Layer "12V_L01_P007" (solid, pour order 7): 166,144.327 174.1,144.327 174.1,143.127 166,143.127
SW2 on Top Layer "SW2_L01_P006" (solid, pour order 6): 177.9,144.627 177.9,145.427 179.7,145.427 180.3,146.027 189.9,146.027 189.9,143.227 184.8,143.227 183.4,144.627
7V on Top Layer "7V_L01_P005" (solid, pour order 5): 190,155.027 179.7,155.027 179.7,146.527 181.2,146.527 181.2,150.327 183.4,152.527 190,152.527
GND on Top Layer "GND_L01_P004" (solid, pour order 4): 174.2,108.4 177.7,108.4 177.7,109.6 177.3,110 177.3,113.4 181.5,113.4 181.5,114 177.4,114 177.4,115.5 178.2,116.3 178.2,125 168.5,125 168.5,115.9 171.6,115.9 172.3,116.6 172.3,117.8 172.6,118.1 175.3,118.1 175.3,116.1 174.5,115.3 174.5,110.1 174.2,109.8
12V on Top Layer "12V_L01_P002" (solid, pour order 2): 166,114.2 174.1,114.2 174.1,113 166,113
SW1 on Top Layer "SW1_L01_P001" (solid, pour order 1): 177.9,114.5 177.9,115.3 179.7,115.3 180.3,115.9 189.9,115.9 189.9,113.1 184.8,113.1 183.4,114.5
5V on Top Layer "5V_L01_P000" (solid, pour order 0): 190,124.9 179.7,124.9 179.7,116.4 181.2,116.4 181.2,120.2 183.4,122.4 190,122.4

## Silkscreen, mask and mechanical layers (free items; w line width, h text height)
Mechanical 1:
  the board outline again, w0.2